# Altium PCB 88路激光器工程_3.PcbDoc
Units mil, origin at the board's own origin, x right, y up, seen from the top; angles counter-clockwise.
Board outline 18834.65 x 3149.61 mil, 2 copper layers (Top Layer, Bottom Layer), stack 35.433 mil thick; 143 components, 135 nets, 448 pads, 92 vias.
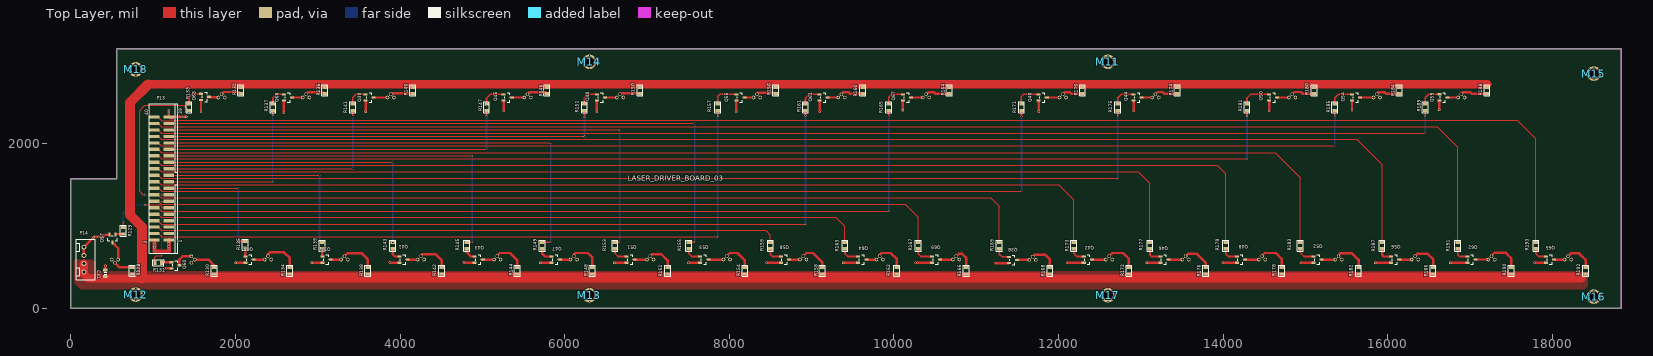
[diagram p0: Top Layer view]
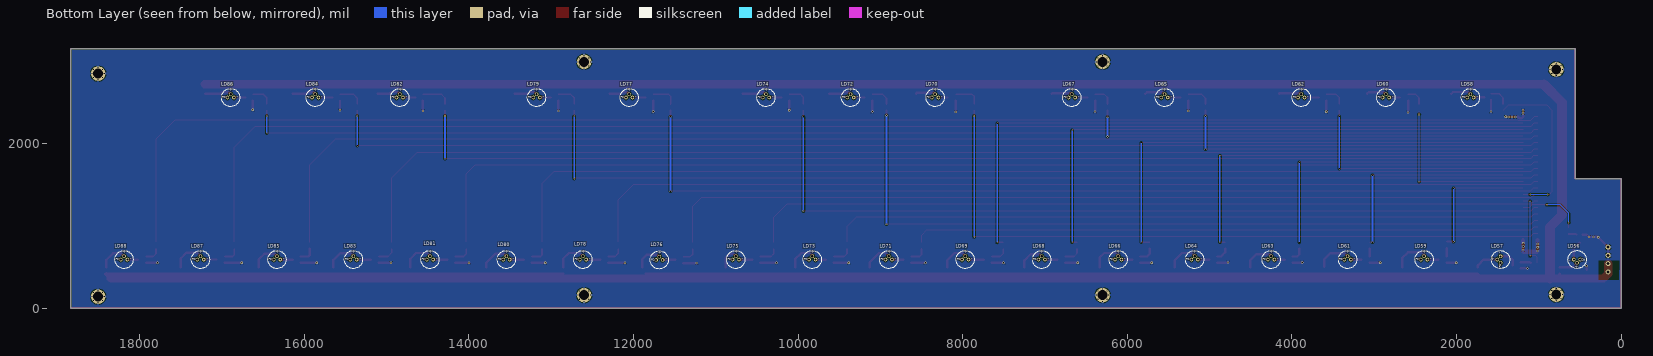
[diagram p1: Bottom Layer view, seen from below]

## Layer stack, top to bottom
Top Solder: solder mask 19.685, Solder Resist, Dk 3.5
Top Layer: signal copper 7.874
Dielectric 1: dielectric 19.685, FR-4, Dk 4.8
Bottom Layer: signal copper 7.874
Bottom Solder: solder mask 7.874, Solder Resist, Dk 3.5

## Board outline
0,0 18834.65,0 18834.65,3149.61 555.12,3149.61 555.12,1574.8 0,1574.8

## Design rules (kind name [scope] priority, off if disabled: settings)
Clearance [All] p1: gap=10 ignorepadtopadclearanceinfootprint=FALSE except(0: Arc-Hole Track-Hole SMDPad-Hole THPad-Hole Via-Hole Fill-Hole Poly-Hole Region-Hole Text-Hole)
HoleSize [All] p1: absolutevalues=TRUE maxlimit=200 minlimit=1 maxpercent=80.000 minpercent=20.000
HoleToHoleClearance [All] p1: gap=6 allowstackedmicrovias=TRUE
MinimumSolderMaskSliver [All] p1 off: minsoldermaskwidth=10
PolygonConnect [All] p1: connectstyle=Relief reliefconductorwidth=30 reliefentries=4 polygonreliefangle="90 Angle" airgapwidth=10
RoutingVias [All] p1: holewidth=28 width=50 viastyle="Through Hole" minholewidth=28 minwidth=50 maxholewidth=28 maxwidth=50
SilkToSilkClearance [All] p1 off: silktosilkclearance=10
SilkToSolderMaskClearance [IsPad] p1 off: minsilkscreentomaskgap=10 clearancetoexposedcopper=TRUE
SolderMaskExpansion [All] p1: expansion=4
Width [All] p1: maxlimit=200 minlimit=10 preferedwidth=30 minimp=50.000000 maximp=50.000000 favimp=50.000000
25 further rules are at their usual default settings.

## Components (designator, comment, footprint, x,y, rotation, side; value= is the part's Value field where it differs from the comment)
C31 "10uF/6.3V" C0805 420,425 r90 top
LD56 "LD" LD_3P 535.43,590.55 r0 bottom
LD57 "LD" LD_3P 1464.57,590.55 r90 bottom
LD58 "LD" LD_3P 1830.71,2559.06 r180 bottom
LD59 "LD" LD_3P 2393.7,590.55 r180 bottom
LD60 "LD" LD_3P 2858.27,2559.06 r180 bottom
LD61 "LD" LD_3P 3322.83,590.55 r180 bottom
LD62 "LD" LD_3P 3885.83,2559.06 r180 bottom
LD63 "LD" LD_3P 4251.97,590.55 r180 bottom
LD64 "LD" LD_3P 5181.1,590.55 r180 bottom
LD65 "LD" LD_3P 5547.24,2559.06 r180 bottom
LD66 "LD" LD_3P 6110.24,590.55 r180 bottom
LD67 "LD" LD_3P 6673.23,2559.06 r180 bottom
LD68 "LD" LD_3P 7039.37,590.55 r180 bottom
LD69 "LD" LD_3P 7968.5,590.55 r180 bottom
LD70 "LD" LD_3P 8334.65,2559.06 r180 bottom
LD71 "LD" LD_3P 8897.64,590.55 r180 bottom
LD72 "LD" LD_3P 9362.2,2559.06 r180 bottom
LD73 "LD" LD_3P 9826.77,590.55 r180 bottom
LD74 "LD" LD_3P 10389.76,2559.06 r180 bottom
LD75 "LD" LD_3P 10755.91,590.55 r180 bottom
LD76 "LD" LD_3P 11685.04,585.55 r180 bottom
LD77 "LD" LD_3P 12051.18,2559.06 r180 bottom
LD78 "LD" LD_3P 12614.17,590.55 r180 bottom
LD79 "LD" LD_3P 13177.17,2559.06 r180 bottom
LD80 "LD" LD_3P 13543.31,590.55 r180 bottom
LD81 "LD" LD_3P 14472.44,590.55 r180 bottom
LD82 "LD" LD_3P 14838.58,2559.06 r180 bottom
LD83 "LD" LD_3P 15401.57,590.55 r180 bottom
LD84 "LD" LD_3P 15866.14,2559.06 r180 bottom
LD85 "LD" LD_3P 16330.71,590.55 r180 bottom
LD86 "LD" LD_3P 16893.7,2559.06 r180 bottom
LD87 "LD" LD_3P 17259.84,590.55 r180 bottom
LD88 "LD" LD_3P 18188.98,590.55 r180 bottom
M11 "HOLE-8STARS" HOLE_3MM 12598.43,2992.13 r0 top
M12 "HOLE-8STARS" HOLE_3MM 787.4,165 r0 top
M13 "HOLE-8STARS" HOLE_3MM 6299.21,157.48 r0 top
M14 "HOLE-8STARS" HOLE_3MM 6299.21,2992.13 r0 top
M15 "HOLE-8STARS" HOLE_3MM 18503.94,2850 r0 top
M16 "HOLE-8STARS" HOLE_3MM 18503.94,140 r0 top
M17 "HOLE-8STARS" HOLE_3MM 12598.43,157.48 r0 top
M18 "HOLE-8STARS" HOLE_3MM 787.4,2900 r0 top
P13 "Header 20X2" JATG_2.0MM_2X20P_SMD 1102.36,1574.8 r90 top
P14 "Header 4" XH2.54MM_4P_立式 157.48,590.55 r270 top
Q37 "NMOS" SOT23-3 3105,590 r180 top
Q38 "NMOS" SOT23-3 11445,585 r180 top
Q39 "NMOS" SOT23-3 3629.92,2559.06 r180 top
Q40 "NMOS" SOT23-3 11807.09,2559.06 r180 top
Q41 "NMOS" SOT23-3 4040,590 r180 top
Q42 "NMOS" SOT23-3 12355,590 r180 top
Q43 "NMOS" SOT23-3 4955,590 r180 top
Q44 "NMOS" SOT23-3 12960.63,2559.06 r180 top
Q45 "NMOS" SOT23-3 5307.09,2559.06 r180 top
Q46 "NMOS" SOT23-3 13285,590 r180 top
Q47 "NMOS" SOT23-3 5890,590 r180 top
Q48 "NMOS" SOT23-3 14215,590 r180 top
Q49 "NMOS" SOT23-3 6440.94,2559.06 r180 top
Q50 "NMOS" SOT23-3 14606.3,2559.06 r180 top
Q51 "NMOS" SOT23-3 6800,590 r180 top
Q52 "NMOS" SOT23-3 15145,590 r180 top
Q53 "NMOS" SOT23-3 7695,590 r180 top
Q54 "NMOS" SOT23-3 15614.17,2559.06 r180 top
Q55 "NMOS" SOT23-3 8133.86,2559.06 r180 top
Q56 "NMOS" SOT23-3 16090,590 r180 top
Q57 "NMOS" SOT23-3 505,845 r90 top
Q58 "NMOS" SOT23-3 8675,590 r180 top
Q59 "NMOS" SOT23-3 16675,2560 r180 top
Q60 "NMOS" SOT23-3 1270,520 r180 top
Q61 "NMOS" SOT23-3 9145.67,2559.06 r180 top
Q62 "NMOS" SOT23-3 17015,590 r180 top
Q63 "NMOS" SOT23-3 1629.92,2566.93 r180 top
Q64 "NMOS" SOT23-3 9615,590 r180 top
Q65 "NMOS" SOT23-3 17970,590 r180 top
Q66 "NMOS" SOT23-3 2170,590 r180 top
Q67 "NMOS" SOT23-3 10157.48,2559.06 r180 top
Q68 "NMOS" SOT23-3 2637.8,2559.06 r180 top
Q69 "NMOS" SOT23-3 10510,590 r180 top
R128 "200R" R0805 745,455 r270 top
R129 "2k" R0805 635,940 r90 top
R130 "200R" R0805 1740,455 r270 top
R131 "2k" R0805 1060,550 r180 top
R132 "200R" R0805 2065,2645 r90 top
R133 "2k" R0805 1435,2440.59 r270 top
R134 "200R" R0805 2660,455 r270 top
R135 "2k" R0805 2120,770 r90 top
R136 "200R" R0805 3085,2645 r90 top
R137 "2k" R0805 2455,2440.59 r270 top
R138 "200R" R0805 3605,455 r270 top
R139 "2k" R0805 3055,760.5 r90 top
R140 "200R" R0805 4155,2645 r90 top
R141 "2k" R0805 3425,2440.59 r270 top
R142 "200R" R0805 4505,455 r270 top
R143 "2k" R0805 3910,760 r90 top
R144 "200R" R0805 5425,455 r270 top
R145 "2k" R0805 4810,760 r90 top
R146 "200R" R0805 5780,2645 r90 top
R147 "2k" R0805 5050,2440.59 r270 top
R148 "200R" R0805 6335,455 r270 top
R149 "2k" R0805 5725,760 r90 top
R150 "200R" R0805 6915,2645 r90 top
R151 "2k" R0805 6240,2440.59 r270 top
R152 "200R" R0805 7250,455 r270 top
R153 "2k" R0805 6610,760 r90 top
R154 "200R" R0805 8190,455 r270 top
R155 "2k" R0805 7505,760 r90 top
R156 "200R" R0805 8565,2645 r90 top
R157 "2k" R0805 7860,2440.59 r270 top
R158 "200R" R0805 9130,455 r270 top
R159 "2k" R0805 8500,760 r90 top
R160 "200R" R0805 9620,2645 r90 top
R161 "2k" R0805 8925,2440.59 r270 top
R162 "200R" R0805 10035,455 r270 top
R163 "2k" R0805 9405,760 r90 top
R164 "200R" R0805 10670,2645 r90 top
R165 "2k" R0805 9935,2440.59 r270 top
R166 "200R" R0805 10880,455 r270 top
R167 "2k" R0805 10295,760 r90 top
R168 "200R" R0805 11895,455 r270 top
R169 "2k" R0805 11280,760 r90 top
R170 "200R" R0805 12290,2645 r90 top
R171 "2k" R0805 11550,2440.59 r270 top
R172 "200R" R0805 12855,455 r270 top
R173 "2k" R0805 12185,760 r90 top
R174 "200R" R0805 13440,2645 r90 top
R175 "2k" R0805 12720,2440.59 r270 top
R176 "200R" R0805 13790,455 r270 top
R177 "2k" R0805 13110,760 r90 top
R178 "200R" R0805 14710,455 r270 top
R179 "2k" R0805 14030,760 r90 top
R180 "200R" R0805 15105,2645 r90 top
R181 "2k" R0805 14290,2440.59 r270 top
R182 "200R" R0805 15645,455 r270 top
R183 "2k" R0805 14935,760 r90 top
R184 "200R" R0805 16140,2645 r90 top
R185 "2k" R0805 15355,2440.59 r270 top
R186 "200R" R0805 16550,455 r270 top
R187 "2k" R0805 15930,760 r90 top
R188 "200R" R0805 17205,2645 r90 top
R189 "2k" R0805 16455,2440.59 r270 top
R190 "200R" R0805 17500,455 r270 top
R191 "2k" R0805 16850,760 r90 top
R192 "200R" R0805 18405,455 r270 top
R193 "2k" R0805 17800,760 r90 top

## Footprints (in the part's own frame and the unit in brackets; to place one, negate y for a bottom-side part, rotate by r counter-clockwise, add the part's x,y. Pads: shape width x height; smd on the part's side, far side on the other; paste and mask are expansions set on the pad)
C0805 [mm]
  rect 1x1.4 smd: 1(-1.003,0) 2(1.003,0)
  silkscreen extent -0.43,-0.43 0.43,0.45, body extent -1.21,-0.62 1.14,0.67, height 0.5
HOLE_3MM [mm]
  round 0.5 hole 0.3: 1(0,1.9) 2(-1.4,1.25) 3(-1.9,0) 4(-1.4,-1.25) 5(0,-1.9) 6(1.4,-1.25) 7(1.9,0) 8(1.4,1.25)
  round 4.5 hole 3.05: 9(0,0)
JATG_2.0MM_2X20P_SMD [mm]
  rect 1x3.2 smd: 1(-19,-2.25) 2(-19,2.25) 3(-17,-2.25) 4(-17,2.25) 5(-15,-2.25) 6(-15,2.25) 7(-13,-2.25) 8(-13,2.25) 9(-11,-2.25) 10(-11,2.25) 11(-9,-2.25) 12(-9,2.25) 13(-7,-2.25) 14(-7,2.25) 15(-5,-2.25) 16(-5,2.25) 17(-3,-2.25) 18(-3,2.25) 19(-1,-2.25) 20(-1,2.25) 21(1,-2.25) 22(1,2.25) 23(3,-2.25) 24(3,2.25) 25(5,-2.25) 26(5,2.25) 27(7,-2.25) 28(7,2.25) 29(9,-2.25) 30(9,2.25) 31(11,-2.25) 32(11,2.25) 33(13,-2.25) 34(13,2.25) 35(15,-2.25) 36(15,2.25) 37(17,-2.25) 38(17,2.25) 39(19,-2.25) 40(19,2.25)
  silkscreen extent -23,-5 23,3.75, body extent -22.99,-4.25 23,3.8, height 6.9
LD_3P [mm]
  round 1.1 hole 0.7: 1(0,1) ""(-1,0)
  round 1.1 hole 0.6: 2(1,0)
  silkscreen extent -2.8,-2.8 2.79,2.8, body extent -3,-3 3,3, height 5
R0805 [mm]
  rect 1x1.4 smd: 1(-1.003,0) 2(1.003,0)
  silkscreen extent -1.71,-0.9 1.69,0.9, body extent -1.21,-0.62 1.14,0.67, height 0.5
SOT23-3 [mm]
  rect 1.25x0.7 smd: 1(1.25,-0.95) 2(1.25,0.95) 3(-1.25,0)
  silkscreen extent -0.65,-1.46 0.9,1.46
XH2.54MM_4P_立式 [mil]
  round 60 hole 35.43: 1(-150,0) 2(-50,0) 3(50,0) 4(150,0)
  silkscreen extent -246,-91 246,138, body extent -246,-91 246,138, height 272

## Part data
C31: library part C
P13: "Header, 20-Pin, Dual row", LatestRevisionDate=17-Jul-2002, LatestRevisionNote="Re-released for DXP Platform.", Publisher="Altium Limited"
P14: "Header, 4-Pin", LatestRevisionDate=17-Jul-2002, LatestRevisionNote="Re-released for DXP Platform.", Publisher="Altium Limited"
R128 R129 R130 R131 R132 R133 R134 R135 R136 R137 R138 R139 R140 R141 R142 R143 R144 R145 R146 R147 R148 R149 R150 R151 R152 R153 R154 R155 R156 R157 R158 R159 R160 R161 R162 R163 R164 R165 R166 R167 R168 R169 R170 R171 R172 R173 R174 R175 R176 R177 R178 R179 R180 R181 R182 R183 R184 R185 R186 R187 R188 R189 R190 R191 R192 R193: library part Res2, "Resistor", LatestRevisionDate=17-Jul-2002, LatestRevisionNote="Re-released for DXP Platform.", PackageDescription="Axial Device, Thru-Hole; 2 Leads; 0.4 in Pin Spacing", PackageReference=AXIAL-0.4, Published=8-Jun-2000, Publisher="Altium Limited"

## Via types
v1: diameter 27.56, hole 15.75, Top Layer to Bottom Layer, tented both sides, 49 vias
v2: diameter 19.68, hole 11.81, Top Layer to Bottom Layer, tented both sides, 43 vias

## Nets (pads, with @x,y where several pads share a name; then routed paths per layer and width w, separated by ;. In a path a pad name is that pad's centre, name@x,y a point inside that pad or via, vN(x,y) a via of type N, cw(c..) or ccw(c..) an arc to the next point about the centre after c; other vN are vias at no path point)
GND: C31.2 M11.1 M11.2 M11.3 M11.4 M11.5 M11.6 M11.7 M11.8 M11.9 M12.1 M12.2 M12.3 M12.4 M12.5 M12.6 M12.7 M12.8 M12.9 M13.1 M13.2 M13.3 M13.4 M13.5 M13.6 M13.7 M13.8 M13.9 M14.1 M14.2 M14.3 M14.4 M14.5 M14.6 M14.7 M14.8 M14.9 M15.1 M15.2 M15.3 M15.4 M15.5 M15.6 M15.7 M15.8 M15.9 M16.1 M16.2 M16.3 M16.4 M16.5 M16.6 M16.7 M16.8 M16.9 M17.1 M17.2 M17.3 M17.4 M17.5 M17.6 M17.7 M17.8 M17.9 M18.1 M18.2 M18.3 M18.4 M18.5 M18.6 M18.7 M18.8 M18.9 P13.1 P13.2 P13.39 P14.1 P14.2 Q37.2 Q38.2 Q39.2 Q40.2 Q41.2 Q42.2 Q43.2 Q44.2 Q45.2 Q46.2 Q47.2 Q48.2 Q49.2 Q50.2 Q51.2 Q52.2 Q53.2 Q54.2 Q55.2 Q56.2 Q57.2 Q58.2 Q59.2 Q60.2 Q61.2 Q62.2 Q63.2 Q64.2 Q65.2 Q66.2 Q67.2 Q68.2 Q69.2 | length 5927.3
  Top Layer w30: P14.2 P14.1 281.93,865 v1(335,865) v1(390,865) 419.2,894.2 Q57.2 ; C31.2 420,514.49 v1(421.26,515.75) ; v1(1137.4,482.6) Q60.2 ; v1(1190.94,2404.06) P13.39 1190.94,2322.57 1204.74,2308.78 1237.15,2308.78 1250.94,2322.57 1250.94,2322.83 v1@1400.94,2322.83 ; v1(1580.72,2387.81) Q63.2 ; v1(2002.4,552.6) Q66.2 ; v1@2588.6,2376 Q68.2 ; v1(2925,550) 2927.6,552.6 Q37.2 ; v1@3580.72,2383.87 Q39.2 ; v1(3875,555) 3877.4,552.6 Q41.2 ; v1(4775,555) 4777.4,552.6 Q43.2 ; v1(5257.89,2395.68) Q45.2 ; v1(5702.4,552.6) Q47.2 ; v1(6391.74,2387.81) Q49.2 ; v1(6602.4,552.6) Q51.2 ; v1(7502.6,552.6) Q53.2 ; v1(8084.66,2383.87) Q55.2 ; v1(8452.6,552.6) Q58.2 ; v1(9096.47,2387.81) Q61.2 ; v1(9382.4,552.6) Q64.2 ; v1(10108.28,2403.56) Q67.2 ; v1(10262.4,552.6) Q69.2 ; v1(11232.4,547.6) Q38.2 ; v1(11757.89,2387.81) Q40.2 ; v1(12102.6,552.6) Q42.2 ; v1(12911.43,2395.68) Q44.2 ; v1(13072.4,552.6) Q46.2 ; v1(13997.4,552.6) Q48.2 ; v1(14557.1,2395.66) Q50.2 ; v1(14945,550) 14945,550.2 14947.4,552.6 Q52.2 ; v1(15564.97,2403.56) Q54.2 ; v1(15847.4,552.6) Q56.2 ; v1(16625.8,2410.8) Q59.2 ; v1(16757.4,552.6) Q62.2 ; v1(17782.4,552.6) Q65.2
  Top Layer w50: P13.2 1015,825.55 v1(1015,695) 1015,692.56 1022.56,685 1185,685 1190.94,690.94 P13.1@1190.94,825
  other v1: 1190.94,705 1013.78,740 1189.72,750 1013.78,780 1189.72,790 276.93,860 1285.94,2321.89 1325.94,2321.89 1365.94,2321.89 1400.94,2324.06 1191.89,2369.06 2588.6,2377.95 3582.68,2385.83
LD56: P13.11 R129.2 | length 784.4
  Top Layer w10: R129.2 v2(635,1040) ; v2(900.16,1255.16) 1082.98,1255.16 1117.67,1220.47 P13.11
  Bottom Layer w10: v2(635,1040) 635,1150 740.16,1255.16 v2(900.16,1255.16)
LD57: P13.13 R131.2 | length 907.8
  Top Layer w10: R131.2 1020.5,615.5 1040,635 v2(1105,635) ; v2(1105.79,1299.21) P13.13
  Bottom Layer w10: v2(1105,635) 1105,1298.42 v2(1105.79,1299.21)
LD58: P13.15 R133.2 | length 2006.8
  Top Layer w10: v2(890,1380) 875,1380 835,1420 835,2400 900,2465 1371.09,2465 R133.2 ; v2(1105,1380) 1107.05,1377.95 P13.15
  Bottom Layer w10: v2(890,1380) v2(1105,1380)
LD59: P13.17 R135.2 | length 1577.3
  Top Layer w10: P13.17 v2@2038,1456.69
  Top Layer w20: v2(2035,810) 2035.5,809.5 R135.2
  Bottom Layer w20: v2(2035,810) v2(2035,1455)
LD60: P13.19 R137.2 | length 2130.1
  Top Layer w10: P13.19 v2@2455,1535.43 ; v1(2455,2350) R137.2
  Bottom Layer w10: v2(2455,1535) v1(2455,2350)
LD61: P13.21 R139.2 | length 2669.9
  Top Layer w10: P13.21 v2@3015.83,1614.17
  Top Layer w20: v2(3020,800) R139.2
  Bottom Layer w20: v2(3020,800) v2@3020,1610
  other v2: 3020,1615
LD62: P13.23 R141.2 | length 2940.1
  Top Layer w10: P13.23 v2(3425,1695)
  Top Layer w20: v2(3425,2330) R141.2
  Bottom Layer w20: v2(3425,1695) v2(3425,2330)
LD63: P13.25 R143.2 | length 3690.2
  Top Layer w10: P13.25 1192.6,1770 v2(3910,1770)
  Bottom Layer w20: v2(3910,799.5) v2(3910,1770)
LD64: P13.27 R145.2 | length 4799.3
  Top Layer w10: P13.27 v2@4875,1850.39
  Top Layer w20: R145.2 4874.5,799.5 v2(4875,800)
  Bottom Layer w20: v2(4875,800) v2(4875,1850)
LD65: P13.29 R147.2 | length 4324.3
  Top Layer w10: P13.29 v2@5044.13,1929.13
  Top Layer w20: v2(5050,2330) R147.2
  Bottom Layer w20: v2(5050,1930) v2(5050,2330)
LD66: P13.31 R149.2 | length 5954.6
  Top Layer w10: P13.31 v2(5830,2010)
  Top Layer w20: R149.2 v2@5830.5,799.5
  Bottom Layer w20: v2(5830,800) v2(5830,2010)
LD67: P13.33 R151.2 | length 5365.8
  Top Layer w10: P13.33 6238.39,2086.61 v2(6240,2085)
  Top Layer w20: v2(6240,2320) R151.2
  Bottom Layer w20: v2(6240,2085) v2(6240,2320)
LD68: P13.35 R153.2 | length 6899.3
  Top Layer w10: P13.35 v2@6669.65,2165.35
  Top Layer w20: R153.2 6610.5,800 v2(6670,800)
  Bottom Layer w20: v2(6670,800) v2@6670,2160.35
  other v2: 6669.65,2160.35
LD69: P13.37 R155.2 | length 7910.3
  Top Layer w10: P13.37 v2@7580,2244.09
  Top Layer w20: R155.2 v2(7580.5,799.5)
  Bottom Layer w20: v2(7580,2245) 7580,800 v2(7580.5,799.5)
LD70: P13.4 R157.2 | length 8399.1
  Top Layer w10: P13.4 1064.49,905.51 1105,865 v2(7860,865)
  Top Layer w20: v2(7860,2335) R157.2
  Bottom Layer w20: v2(7860,865) v2(7860,2335)
LD71: P13.6 R159.2 | length 7612.8
  Top Layer w10: P13.6 1060.75,984.25 1100,945 8440,945 8500,885 R159.2
LD72: P13.8 R161.2 | length 9305.1
  Top Layer w10: P13.8 1057.01,1062.99 1100,1020 v2@8920,1020
  Top Layer w20: v2(8925,2340) R161.2
  Bottom Layer w20: v2(8925,1020) v2(8925,2340)
LD73: P13.10 R163.2 | length 8647.5
  Top Layer w10: P13.10 1063.27,1141.73 1100,1105 9295,1105 9405,995 R163.2
LD74: P13.12 R165.2 | length 10154.1
  Top Layer w10: P13.12 1059.53,1220.47 1100,1180 v2(9935,1180)
  Top Layer w20: v2(9935,2325) R165.2
  Bottom Layer w20: v2@9935,1185 v2(9935,2325)
LD75: P13.14 R167.2 | length 9667.2
  Top Layer w10: P13.14 1055.79,1299.21 1073.57,1281.43 1085,1281.43 1106.43,1260 10140,1260 10295,1105 R167.2
LD76: P13.16 R169.2 | length 10760.9
  Top Layer w10: P13.16 1057.05,1377.95 1095,1340 11175,1340 11280,1235 R169.2
LD77: P13.18 R171.2 | length 11532.5
  Top Layer w10: P13.18 1067.21,1456.69 1103.91,1420 v2(11550,1420)
  Top Layer w20: v2(11550,2325) R171.2
  Bottom Layer w20: v2(11550,1420) v2(11550,2325)
LD78: P13.20 R173.2 | length 11778
  Top Layer w10: P13.20 1059.57,1535.43 1095,1500 12000,1500 12185,1315 R173.2
LD79: P13.22 R175.2 | length 12548.5
  Top Layer w10: P13.22 1060.83,1614.17 1100,1575 v2(12720,1575)
  Top Layer w20: v2(12720,2330) R175.2
  Bottom Layer w20: v2(12720,1575) v2(12720,2330)
LD80: P13.24 R177.2 | length 12885.4
  Top Layer w10: P13.24 1062.09,1692.91 1100,1655 12970,1655 13110,1515 R177.2
LD81: P13.26 R179.2 | length 13908.3
  Top Layer w10: P13.26 1063.35,1771.65 1100,1735 13930,1735 14030,1635 R179.2
LD82: P13.28 R181.2 | length 13877
  Top Layer w10: P13.28 1064.61,1850.39 1100,1815 v2(14290,1815)
  Top Layer w20: v2(14290,2335) R181.2
  Bottom Layer w20: v2(14290,1815) v2(14290,2335)
LD83: P13.30 R183.2 | length 14849.3
  Top Layer w10: P13.30 1060.87,1929.13 1100,1890 14630,1890 14935,1585 R183.2
LD84: P13.32 R185.2 | length 14782.4
  Top Layer w10: P13.32 1062.13,2007.87 1096.81,1973.19 15353.19,1973.19 v2(15355,1975)
  Top Layer w20: v2(15355,2335) R185.2
  Bottom Layer w20: v2(15355,1975) v2(15355,2335)
LD85: P13.34 R187.2 | length 16003.2
  Top Layer w10: P13.34 1058.39,2086.61 1095,2050 15625,2050 15930,1745 R187.2
LD86: P13.36 R189.2 | length 15734
  Top Layer w10: P13.36 1059.65,2165.35 1100,2125 v2(16455,2125)
  Top Layer w20: v2(16455,2335) R189.2
  Bottom Layer w20: v2(16455,2125) v2(16455,2335)
LD87: P13.38 R191.2 | length 17111.5
  Top Layer w10: P13.38 1060.91,2244.09 1100,2205 16600,2205 16850,1955 R191.2
LD88: P13.40 R193.2 | length 18157.9
  Top Layer w10: P13.40 1057.09,2322.83 1080.35,2299.57 1080.35,2299.65 1101.22,2278.78 1249.58,2278.78 1255.8,2285 17570,2285 17800,2055 R193.2
NetLD56_1: LD56.1 R128.1 | length 233
  Top Layer w30: LD56.1 592.11,494.5 R128.1
NetLD56_2: LD56.2 Q57.3 | length 234.2
  Top Layer w30: Q57.3 574.8,726 LD56.2
NetLD57_1: LD57.1 R130.1 | length 290.8
  Top Layer w20: LD57.1 LD57.1@1520,590.55
  Top Layer w30: LD57.1@1520,590.55 1669.45,590.55 1740,520 R130.1
NetLD57_2: LD57.2 Q60.3 | length 231.4
  Top Layer w30: Q60.3 1319.2,589.2 1359.92,629.92 LD57.2
NetLD58_1: LD58.1 R132.1 | length 253.2
  Top Layer w30: LD58.1 1858.27,2625.98 2041,2625.98 R132.1@2063.24,2603.74
NetLD58_2: LD58.2 Q63.3 | length 128.8
  Top Layer w30: Q63.3@1665,2565 1785.39,2565 LD58.2
NetLD59_1: LD59.1 R134.1 | length 447
  Top Layer w30: LD59.1@2393.07,629.92 LD59.1@2393.07,635.24 ; LD59.1 2393.7,653.54 2417.32,677.17 2590.55,677.17 2660,607.72 R134.1
NetLD59_2: LD59.2 Q66.3 | length 135.4
  Top Layer w30: Q66.3 2353.78,590 LD59.2
NetLD60_1: LD60.1 R136.1 | length 243.4
  Top Layer w30: LD60.1 2881.89,2622.05 3068.45,2622.05 R136.1
NetLD60_2: LD60.2 Q68.3 | length 131.9
  Top Layer w30: Q68.3 LD60.2
NetLD61_1: LD61.1 R138.1 | length 426.2
  Top Layer w20: R138.1 R138.1@3605,505
  Top Layer w30: LD61.1 3357.91,665 3535,665 3605,595 R138.1@3605,505
NetLD61_2: LD61.2 Q37.3 | length 129.5
  Top Layer w30: Q37.3 3282.91,590 LD61.2
NetLD62_1: LD62.1 R140.1 | length 275.8
  Top Layer w30: LD62.1 3897.4,2610 4150.5,2610 R140.1
NetLD62_2: LD62.2 Q39.3 | length 172.4
  Top Layer w30: Q39.3@3674.06,2559.06 LD62.2
NetLD63_1: LD63.1 R142.1 | length 393.2
  Top Layer w30: LD63.1@4251.34,629.92 LD63.1@4251.34,635.24 ; LD63.1 4251.97,637.2 4272.24,657.48 4430.2,657.48 4505,582.68 R142.1
NetLD63_2: LD63.2 Q41.3 | length 123.6
  Top Layer w30: Q41.3 4212.05,590 LD63.2
NetLD64_1: LD64.1 R144.1 | length 390.7
  Top Layer w30: LD64.1@5180.47,629.92 LD64.1@5181.1,630.55 ; LD64.1 LD64.1@5181.1,630.55 ; R144.1 5425,580 5335,670 5210,670 5181.1,641.1 LD64.1@5181.1,630.55
NetLD64_2: LD64.2 Q43.3 | length 137.1
  Top Layer w30: Q43.3 5140.55,590 LD64.2@5141.1,590.55
NetLD65_1: LD65.1 R146.1 | length 249.4
  Top Layer w30: LD65.1 5570.87,2622.05 5763.45,2622.05 R146.1
NetLD65_2: LD65.2 Q45.3 | length 153.5
  Top Layer w30: Q45.3@5354.33,2559.06 LD65.2
NetLD66_1: LD66.1 R148.1 | length 396.5
  Top Layer w30: LD66.1 6110.24,650.24 6130,670 6280,670 6335,615 R148.1
NetLD66_2: LD66.2 Q47.3 | length 131.3
  Top Layer w30: Q47.3 6069.68,590 LD66.2@6070.24,590.55
NetLD67_1: LD67.1 R150.1 | length 248.4
  Top Layer w30: LD67.1 6684.8,2610 6910.5,2610 R150.1
NetLD67_2: LD67.2 Q49.3 | length 145.7
  Top Layer w30: Q49.3@6488.19,2559.06 LD67.2
NetLD68_1: LD68.1 R152.1 | length 337.6
  Top Layer w30: LD68.1 7064.45,655 7175,655 7250,580 R152.1
NetLD68_2: LD68.2 Q51.3 | length 150.4
  Top Layer w30: Q51.3 6998.82,590 LD68.2@6999.37,590.55
NetLD69_1: LD69.1 R154.1 | length 360.9
  Top Layer w30: LD69.1 8008.58,670 8100,670 8190,580 R154.1
NetLD69_2: LD69.2 Q53.3 | length 184.5
  Top Layer w30: Q53.3 7927.95,590 LD69.2@7928.5,590.55
NetLD70_1: LD70.1 R156.1 | length 241.2
  Top Layer w30: LD70.1 8351.22,2615 8555.5,2615 R156.1
NetLD70_2: LD70.2 Q55.3 | length 106.3
  Top Layer w30: Q55.3@8188.98,2559.06 LD70.2
NetLD71_1: LD71.1 R158.1 | length 358.7
  Top Layer w30: LD71.1 8935,667.28 8935,670 9015,670 9130,555 R158.1
NetLD71_2: LD71.2 Q58.3 | length 134.3
  Top Layer w30: Q58.3 8857.72,590 LD71.2
NetLD72_1: LD72.1 R160.1 | length 274.4
  Top Layer w30: LD72.1 9385.83,2622.05 9448.02,2622.05 9464.57,2605.5 R160.1
NetLD72_2: LD72.2 Q61.3 | length 128
  Top Layer w30: Q61.3 LD72.2
NetLD73_1: LD73.1 R162.1 | length 366.3
  Top Layer w30: LD73.1 9826.77,646.77 9850,670 9960,670 10035,595 R162.1
NetLD73_2: LD73.2 Q64.3 | length 123.4
  Top Layer w20: LD73.2@9786.85,590 LD73.2
  Top Layer w30: Q64.3 LD73.2@9786.85,590
NetLD74_1: LD74.1 R164.1 | length 296.9
  Top Layer w30: LD74.1 10393.7,2598.43 10417.32,2622.05 10487.39,2622.05 10503.94,2605.5 R164.1
NetLD74_2: LD74.2 Q67.3 | length 143.7
  Top Layer w30: Q67.3 LD74.2
NetLD75_1: LD75.1 R166.1 | length 272.8
  Top Layer w30: LD75.1 10785.98,660 10830,660 10880,610 R166.1
NetLD75_2: LD75.2 Q69.3 | length 157.6
  Top Layer w30: Q69.3 10559.75,590.55 LD75.2
NetLD76_1: LD76.1 R168.1 | length 340.7
  Top Layer w30: LD76.1 11710.12,650 11835,650 11895,590 R168.1
NetLD76_2: LD76.2 Q38.3 | length 151.7
  Top Layer w30: Q38.3 11494.75,585.55 LD76.2
NetLD77_1: LD77.1 R170.1 | length 255.5
  Top Layer w30: LD77.1 12074.8,2622.05 12137,2622.05 12153.54,2605.5 R170.1
NetLD77_2: LD77.2 Q40.3 | length 155.5
  Top Layer w30: Q40.3 LD77.2
NetLD78_1: LD78.1 R172.1 | length 391.9
  Top Layer w30: LD78.1 12654.25,670 12785,670 12855,600 R172.1
NetLD78_2: LD78.2 Q42.3 | length 170.8
  Top Layer w30: Q42.3 12404.75,590.55 LD78.2
NetLD79_1: LD79.1 R174.1 | length 282.7
  Top Layer w30: LD79.1 13204.72,2625.98 13262.98,2625.98 13283.46,2605.5 R174.1
NetLD79_2: LD79.2 Q44.3 | length 135.5
  Top Layer w30: Q44.3@13002.26,2559.06 LD79.2
NetLD80_1: LD80.1 R176.1 | length 360.2
  Top Layer w30: LD80.1 13573.39,660 13680,660 13790,550 R176.1
NetLD80_2: LD80.2 Q46.3 | length 170
  Top Layer w30: Q46.3 13334.75,590.55 LD80.2
NetLD81_1: LD81.1 R178.1 | length 393.1
  Top Layer w30: LD81.1 14472.44,637.44 14505,670 14640,670 14710,600 R178.1
NetLD81_2: LD81.2 Q48.3 | length 169.1
  Top Layer w30: Q48.3 14432.52,590 LD81.2
NetLD82_1: LD82.1 R180.1 | length 286.3
  Top Layer w30: LD82.1 14866.14,2625.98 14944.08,2625.98 14964.57,2605.5 R180.1
NetLD82_2: LD82.2 Q50.3 | length 149.6
  Top Layer w30: Q50.3@14649.61,2559.06 LD82.2
NetLD83_1: LD83.1 R182.1 | length 388.4
  Top Layer w30: LD83.1 15401.57,641.57 15425,665 15565,665 15645,585 R182.1
NetLD83_2: LD83.2 Q52.3 | length 168.2
  Top Layer w30: Q52.3 15194.75,590.55 LD83.2
NetLD84_1: LD84.1 R184.1 | length 295.1
  Top Layer w30: LD84.1 15866.14,2606.3 15881.89,2622.05 15963.77,2622.05 15980.31,2605.5 R184.1
NetLD84_2: LD84.2 Q54.3 | length 165.4
  Top Layer w30: Q54.3@15661.42,2559.06 LD84.2
NetLD85_1: LD85.1 R186.1 | length 359.6
  Top Layer w30: LD85.1 16330.71,630.71 16360,660 16485,660 16550,595 R186.1
NetLD85_2: LD85.2 Q56.3 | length 152.4
  Top Layer w30: Q56.3 16144.2,590 16290.79,590 LD85.2
NetLD86_1: LD86.1 R188.1 | length 330.4
  Top Layer w30: LD86.1 16920.28,2625 17000,2625 17019.5,2605.5 R188.1
NetLD86_2: LD86.2 Q59.3 | length 135.3
  Top Layer w30: Q59.3@16719.06,2559.06 LD86.2
NetLD87_1: LD87.1 R190.1 | length 401.2
  Top Layer w30: LD87.1 17259.84,634.84 17300,675 17430,675 17500,605 R190.1
NetLD87_2: LD87.2 Q62.3 | length 156.5
  Top Layer w20: Q62.3 17219.92,590 LD87.2
NetLD88_1: LD88.1 R192.1 | length 354.2
  Top Layer w30: LD88.1 18224.06,665 18325,665 18405,585 R192.1
NetLD88_2: LD88.2 Q65.3 | length 130.6
  Top Layer w30: Q65.3 18149.06,590 LD88.2
NetQ37_1: Q37.1 R139.1 | length 93.9
  Top Layer w30: R139.1 3055,628.2 Q37.1
NetQ38_1: Q38.1 R169.1 | length 194.8
  Top Layer w20: R169.1 11280,655 11312.6,622.4 Q38.1
NetQ39_1: Q39.1 R141.1 | length 250.1
  Top Layer w20: R141.1 3425,2558.86 3462.6,2596.46 Q39.1
NetQ40_1: Q40.1 R171.1 | length 313.2
  Top Layer w20: R171.1 11547.24,2482.85 11547.24,2570.87 11572.83,2596.46 Q40.1
NetQ41_1: Q41.1 R143.1 | length 157.7
  Top Layer w30: R143.1 3910,655 3937.6,627.4 Q41.1
NetQ42_1: Q42.1 R173.1 | length 191.9
  Top Layer w20: R173.1 12185,665 12222.6,627.4 Q42.1
NetQ43_1: Q43.1 R145.1 | length 158.1
  Top Layer w30: R145.1 4810,680 4862.6,627.4 Q43.1
NetQ44_1: Q44.1 R175.1 | length 283.3
  Top Layer w20: R175.1 12720,2554.65 12761.81,2596.46 Q44.1
NetQ45_1: Q45.1 R147.1 | length 297
  Top Layer w20: R147.1 5050,2550 5096.46,2596.46 Q45.1
NetQ46_1: Q46.1 R177.1 | length 208.6
  Top Layer w20: R177.1 13110,645 13127.6,627.4 Q46.1
NetQ47_1: Q47.1 R149.1 | length 186.9
  Top Layer w30: R149.1 5725,665 5762.6,627.4 Q47.1
NetQ48_1: Q48.1 R179.1 | length 209.8
  Top Layer w20: R179.1 14030,660 14062.6,627.4 Q48.1
NetQ49_1: Q49.1 R151.1 | length 246.1
  Top Layer w20: R151.1 6240,2558.9 6277.56,2596.46 Q49.1
NetQ50_1: Q50.1 R181.1 | length 358.5
  Top Layer w20: R181.1 14290,2553.78 14332.68,2596.46 Q50.1
NetQ51_1: Q51.1 R153.1 | length 212
  Top Layer w20: R153.1 6610,664.8 6647.4,627.4 Q51.1
NetQ52_1: Q52.1 R183.1 | length 226
  Top Layer w20: R183.1 14935,675 14982.6,627.4 Q52.1
NetQ53_1: Q53.1 R155.1 | length 212
  Top Layer w20: R155.1 7505,664.8 7542.4,627.4 Q53.1
NetQ54_1: Q54.1 R185.1 | length 300.2
  Top Layer w20: R185.1 15355,2551.85 15399.6,2596.46 Q54.1
NetQ55_1: Q55.1 R157.1 | length 327
  Top Layer w20: R157.1 7860,2572.6 7883.86,2596.46 Q55.1
NetQ56_1: Q56.1 R187.1 | length 193.6
  Top Layer w30: R187.1 15930,645 15947.6,627.4 Q56.1
NetQ57_1: Q57.1 R129.1 | length 97.9
  Top Layer w20: Q57.1 548.7,900.5 R129.1
  Top Layer w30: R129.1@633.1,902.4 R129.1
NetQ58_1: Q58.1 R159.1 | length 205.7
  Top Layer w20: R159.1 8500,650 8522.6,627.4 Q58.1
NetQ59_1: Q59.1 R189.1 | length 263.3
  Top Layer w20: R189.1 16455,2555 16497.4,2597.4 Q59.1
NetQ60_1: Q60.1 R131.1 | length 124.4
  Top Layer w30: R131.1 1106.9,557.4 Q60.1
NetQ61_1: Q61.1 R161.1 | length 261.2
  Top Layer w20: R161.1 8925,2550.98 8970.47,2596.46 Q61.1
NetQ62_1: Q62.1 R191.1 | length 198.6
  Top Layer w20: R191.1 16850,645 16867.6,627.4 Q62.1
NetQ63_1: Q63.1 R133.1 | length 242.3
  Top Layer w20: R133.1 1435,2557.05 1482.28,2604.33 Q63.1
NetQ64_1: Q64.1 R163.1 | length 234.8
  Top Layer w20: R163.1 9405,660 9437.6,627.4 Q64.1
NetQ65_1: Q65.1 R193.1 | length 194.8
  Top Layer w20: R193.1 17800,660 17820,640 17832.6,627.4 Q65.1
NetQ66_1: Q66.1 R135.1 | length 103.4
  Top Layer w30: R135.1 2120,628.2 Q66.1
NetQ67_1: Q67.1 R165.1 | length 268.9
  Top Layer w20: R165.1 9935,2560.98 9970.47,2596.46 Q67.1
NetQ68_1: Q68.1 R137.1 | length 227.1
  Top Layer w20: R137.1 2455,2557.36 2494.09,2596.46 Q68.1
NetQ69_1: Q69.1 R167.1 | length 239.8
  Top Layer w20: R167.1 10295,660 10327.6,627.4 Q69.1
VCC2.5: C31.1 P14.3 P14.4 R128.2 R130.2 R132.2 R134.2 R136.2 R138.2 R140.2 R142.2 R144.2 R146.2 R148.2 R150.2 R152.2 R154.2 R156.2 R158.2 R160.2 R162.2 R164.2 R166.2 R168.2 R170.2 R172.2 R174.2 R176.2 R178.2 R180.2 R182.2 R184.2 R186.2 R188.2 R190.2 R192.2 | length 68098.2
  Top Layer w30: R128.2 779.68,380.81 ; 1705.32,380.81 R130.2 R134.2 R138.2 R142.2 R144.2 R148.2 R152.2 R154.2 R158.2 R162.2 R166.2 11851.82,415.5 ; R132.2 R136.2 R140.2 R146.2 R150.2 R156.2 R160.2 R164.2 R170.2 R174.2 R180.2 R184.2 R188.2 ; R172.2 R176.2 R178.2 R182.2 R186.2 R190.2 R192.2
  Top Layer w50: 18350.19,360 R192.2@18405,414.81
  Top Layer w100: P14.3 P14.4 157.48,417.52 215,360 865,360 18350.19,360 ; 940,2720 2075,2720 16140,2720 17210,2720
  Top Layer w120: 865,360 865,985 720,1130 720,2500 940,2720
"": 
pads on no net: LD56. LD57. LD58. LD59. LD60. LD61. LD62. LD63. LD64. LD65. LD66. LD67. LD68. LD69. LD70. LD71. LD72. LD73. LD74. LD75. LD76. LD77. LD78. LD79. LD80. LD81. LD82. LD83. LD84. LD85. LD86. LD87. LD88. P13.3 P13.5 P13.7 P13.9

## Polygon pours and split planes (outlines as drawn)
VCC2.5 on Top Layer "VCC2.5" (solid, remove dead copper, pour order 6): 55,585 265,585 295,555 295,450 18360,450 18430,380 18430,265 18395,230 115,230 40,305 40,570
GND on Bottom Layer "GND" (solid, remove dead copper, pour order 8): 18834.65,3149.61 18834.65,0 0,0 5,5 5,1574.8 555.12,1574.8 555.12,3149.61

## Keep-outs
Keep-Out Layer:
  the board outline again, w10

## Other copper
Bottom Layer:
  pour cut-out: 15.29,582.8 277.2,582.8 280,580 280,345 275,340 25,340 20,345

## Silkscreen, mask and mechanical layers (free items; w line width, h text height)
Top Overlay:
  text "LASER_DRIVER_BOARD_03" at 6765,1545 h60

## Text inside footprints (layer, text, board x,y; h text height)
LD56: Bottom Overlay "-" at 610.43,605.55 h60 r180; Bottom Overlay "PD" at 435.43,605.55 h31.5 r180; Bottom Overlay "+" at 520.43,525.55 h60 r180
LD57: Bottom Overlay "+" at 1529.57,575.55 h60 r270; Bottom Overlay "PD" at 1449.57,490.55 h31.5 r270; Bottom Overlay "-" at 1449.57,665.55 h60 r270
LD58: Bottom Overlay "+" at 1845.71,2624.06 h60; Bottom Overlay "PD" at 1930.71,2544.06 h31.5; Bottom Overlay "-" at 1755.71,2544.06 h60
LD59: Bottom Overlay "-" at 2318.7,575.55 h60; Bottom Overlay "PD" at 2493.7,575.55 h31.5; Bottom Overlay "+" at 2408.7,655.55 h60
LD60: Bottom Overlay "-" at 2783.27,2544.06 h60; Bottom Overlay "PD" at 2958.27,2544.06 h31.5; Bottom Overlay "+" at 2873.27,2624.06 h60
LD61: Bottom Overlay "+" at 3337.83,655.55 h60; Bottom Overlay "PD" at 3422.83,575.55 h31.5; Bottom Overlay "-" at 3247.83,575.55 h60
LD62: Bottom Overlay "-" at 3810.83,2544.06 h60; Bottom Overlay "PD" at 3985.83,2544.06 h31.5; Bottom Overlay "+" at 3900.83,2624.06 h60
LD63: Bottom Overlay "-" at 4176.97,575.55 h60; Bottom Overlay "PD" at 4351.97,575.55 h31.5; Bottom Overlay "+" at 4266.97,655.55 h60
LD64: Bottom Overlay "+" at 5196.1,655.55 h60; Bottom Overlay "PD" at 5281.1,575.55 h31.5; Bottom Overlay "-" at 5106.1,575.55 h60
LD65: Bottom Overlay "+" at 5562.24,2624.06 h60; Bottom Overlay "PD" at 5647.24,2544.06 h31.5; Bottom Overlay "-" at 5472.24,2544.06 h60
LD66: Bottom Overlay "-" at 6035.24,575.55 h60; Bottom Overlay "PD" at 6210.24,575.55 h31.5; Bottom Overlay "+" at 6125.24,655.55 h60
LD67: Bottom Overlay "-" at 6598.23,2544.06 h60; Bottom Overlay "PD" at 6773.23,2544.06 h31.5; Bottom Overlay "+" at 6688.23,2624.06 h60
LD68: Bottom Overlay "+" at 7054.37,655.55 h60; Bottom Overlay "PD" at 7139.37,575.55 h31.5; Bottom Overlay "-" at 6964.37,575.55 h60
LD69: Bottom Overlay "-" at 7893.5,575.55 h60; Bottom Overlay "PD" at 8068.5,575.55 h31.5; Bottom Overlay "+" at 7983.5,655.55 h60
LD70: Bottom Overlay "+" at 8349.65,2624.06 h60; Bottom Overlay "PD" at 8434.65,2544.06 h31.5; Bottom Overlay "-" at 8259.65,2544.06 h60
LD71: Bottom Overlay "+" at 8912.64,655.55 h60; Bottom Overlay "PD" at 8997.64,575.55 h31.5; Bottom Overlay "-" at 8822.64,575.55 h60
LD72: Bottom Overlay "-" at 9287.2,2544.06 h60; Bottom Overlay "PD" at 9462.2,2544.06 h31.5; Bottom Overlay "+" at 9377.2,2624.06 h60
LD73: Bottom Overlay "-" at 9751.77,575.55 h60; Bottom Overlay "PD" at 9926.77,575.55 h31.5; Bottom Overlay "+" at 9841.77,655.55 h60
LD74: Bottom Overlay "+" at 10404.76,2624.06 h60; Bottom Overlay "PD" at 10489.76,2544.06 h31.5; Bottom Overlay "-" at 10314.76,2544.06 h60
LD75: Bottom Overlay "+" at 10770.91,655.55 h60; Bottom Overlay "PD" at 10855.91,575.55 h31.5; Bottom Overlay "-" at 10680.91,575.55 h60
LD76: Bottom Overlay "+" at 11700.04,650.55 h60; Bottom Overlay "PD" at 11785.04,570.55 h31.5; Bottom Overlay "-" at 11610.04,570.55 h60
LD77: Bottom Overlay "-" at 11976.18,2544.06 h60; Bottom Overlay "PD" at 12151.18,2544.06 h31.5; Bottom Overlay "+" at 12066.18,2624.06 h60
LD78: Bottom Overlay "-" at 12539.17,575.55 h60; Bottom Overlay "PD" at 12714.17,575.55 h31.5; Bottom Overlay "+" at 12629.17,655.55 h60
LD79: Bottom Overlay "+" at 13192.17,2624.06 h60; Bottom Overlay "PD" at 13277.17,2544.06 h31.5; Bottom Overlay "-" at 13102.17,2544.06 h60
LD80: Bottom Overlay "+" at 13558.31,655.55 h60; Bottom Overlay "PD" at 13643.31,575.55 h31.5; Bottom Overlay "-" at 13468.31,575.55 h60
LD81: Bottom Overlay "-" at 14397.44,575.55 h60; Bottom Overlay "PD" at 14572.44,575.55 h31.5; Bottom Overlay "+" at 14487.44,655.55 h60
LD82: Bottom Overlay "-" at 14763.58,2544.06 h60; Bottom Overlay "PD" at 14938.58,2544.06 h31.5; Bottom Overlay "+" at 14853.58,2624.06 h60
LD83: Bottom Overlay "+" at 15416.57,655.55 h60; Bottom Overlay "PD" at 15501.57,575.55 h31.5; Bottom Overlay "-" at 15326.57,575.55 h60
LD84: Bottom Overlay "+" at 15881.14,2624.06 h60; Bottom Overlay "PD" at 15966.14,2544.06 h31.5; Bottom Overlay "-" at 15791.14,2544.06 h60
LD85: Bottom Overlay "-" at 16255.71,575.55 h60; Bottom Overlay "PD" at 16430.71,575.55 h31.5; Bottom Overlay "+" at 16345.71,655.55 h60
LD86: Bottom Overlay "-" at 16818.7,2544.06 h60; Bottom Overlay "PD" at 16993.7,2544.06 h31.5; Bottom Overlay "+" at 16908.7,2624.06 h60
LD87: Bottom Overlay "+" at 17274.84,655.55 h60; Bottom Overlay "PD" at 17359.84,575.55 h31.5; Bottom Overlay "-" at 17184.84,575.55 h60
LD88: Bottom Overlay "-" at 18113.98,575.55 h60; Bottom Overlay "PD" at 18288.98,575.55 h31.5; Bottom Overlay "+" at 18203.98,655.55 h60
P13: Top Overlay "39" at 1350.39,2354.33 h39.37 r90; Top Overlay "40" at 940.94,2346.46 h39.37 r90; Top Overlay "2" at 929.13,783.46 h39.37 r90; Top Overlay "1" at 1350.39,791.34 h39.37 r90